# EAGLE board protoflo (EAGLE 6.1)
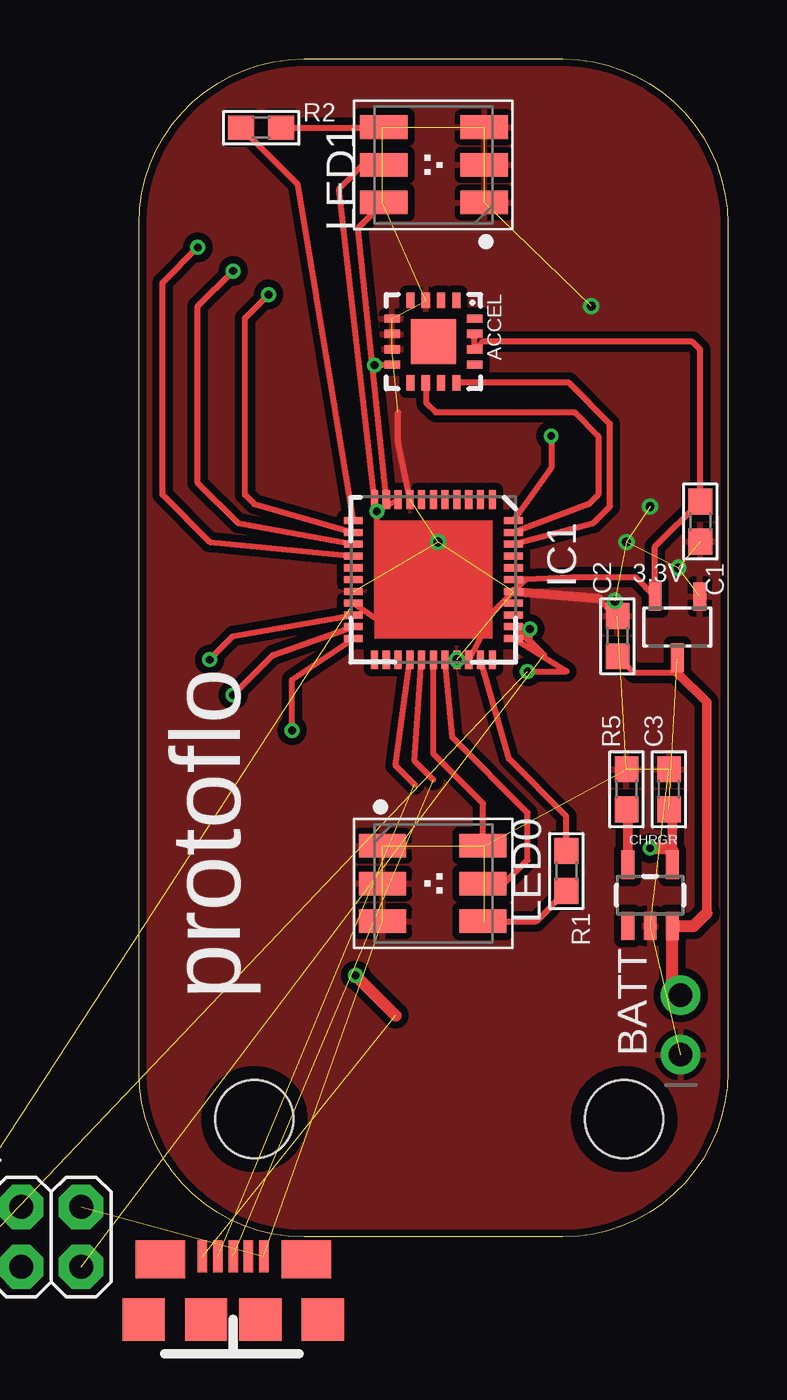
[diagram p0: board, top side]
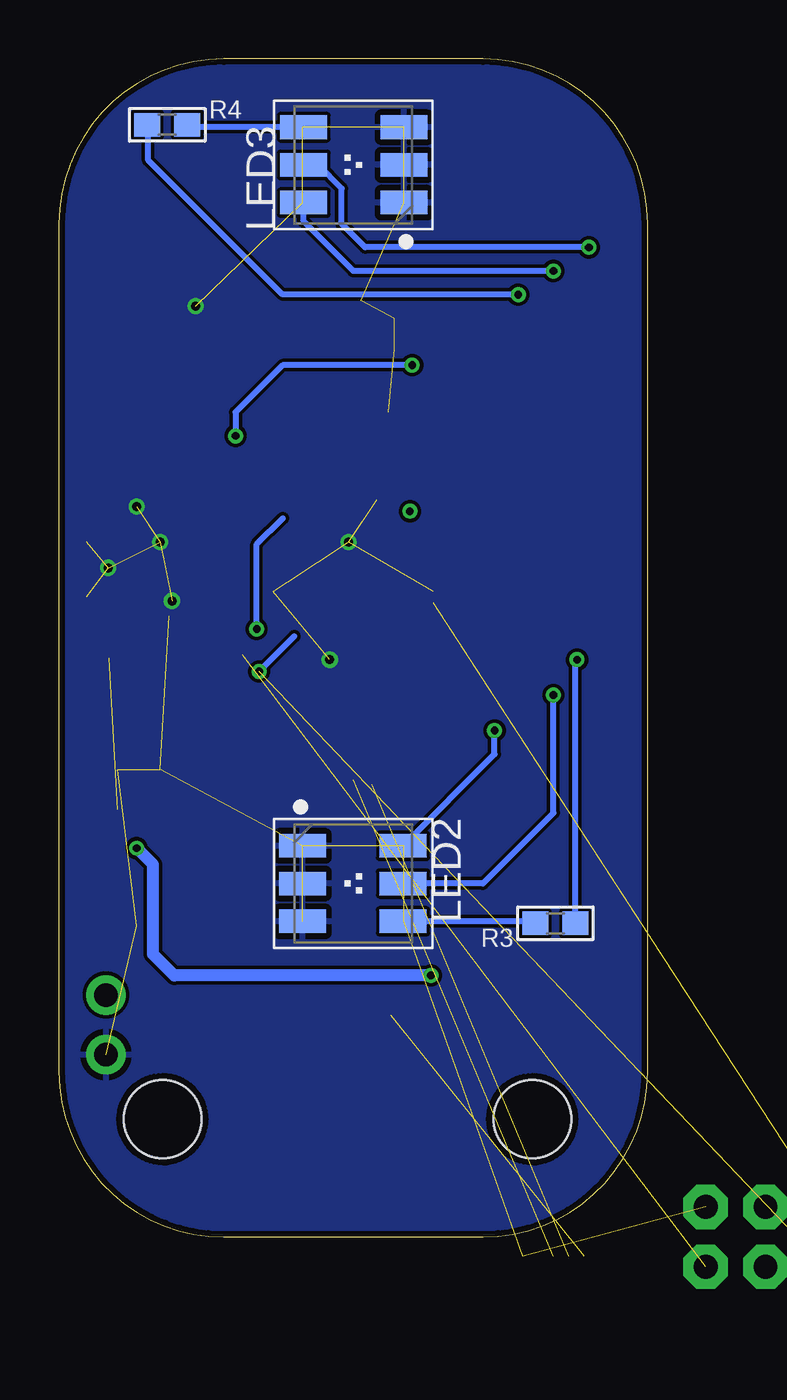
[diagram p1: board, bottom side, seen from below]

Size 25 x 50 mm. Coordinates in mm from the lower left corner, seen from the top.
Outline: 0,43 arc-90 7,50 18,50 arc-90 25,43 25,7 arc-90 18,0 7,0 arc-90 0,7 0,43
Copper layers (1*16): Top 0.035mm / dielectric 1.5mm / Bottom 0.035mm
Design rules: minimum track width 6mil, minimum drill 12mil, track to track 6mil, track to pad 6mil, pad to pad 6mil, via to via 6mil, smd to smd 0mil, copper to edge 10mil, drill to drill 10mil, minimum pad ring 10mil, minimum via ring 6mil, stop-mask expansion 2mil, vias tented up to drill 0mil, thermal gap 10mil
Net classes: 0 default: width 0.254 mm, clearance 0.127 mm

## Footprints (pad centres in the part's own frame; a part is rotated, then mirrored left to right if it is on the bottom)
SOT23-3 = smd 0.55 x 1.2: 1 0.95,1.3; 2 -0.95,1.3; 3 0,-1.3
LFCSP-16 = smd 1.9 x 1.9: 0 0,0 | smd 0.65 x 0.35: 1 -1.75,0.975; 2 -1.75,0.325; 3 -1.75,-0.325; 4 -1.75,-0.975; 9 1.75,-0.975; 10 1.75,-0.325; 11 1.75,0.325; 12 1.75,0.975 | smd 0.35 x 0.65: 5 -0.975,-1.75; 6 -0.325,-1.75; 7 0.325,-1.75; 8 0.975,-1.75; 13 0.975,1.75; 14 0.325,1.75; 15 -0.325,1.75; 16 -0.975,1.75
1X02_ROUND = drill 1 pad 1.676: 1 -1.27,0; 2 1.27,0
0603 = smd 1.1 x 1: 1 -0.85,0; 2 0.85,0
SOT23-5 = smd 0.55 x 1.2: 1 -0.95,-1.3; 2 0,-1.3; 3 0.95,-1.3; 4 0.95,1.3; 5 -0.95,1.3
USB-MICROB = smd 0.4 x 1.35: P1 -1.3,2.675; P2 -0.65,2.675; P3 0,2.675; P4 0.65,2.675; P5 1.3,2.675 | smd 1.8 x 1.8: PAD-LB -1.15,0; PAD-LLB -3.8,0; PAD-RB 1.15,0; PAD-RRB 3.8,0 | smd 2.1 x 1.6: PAD-LT -3.1,2.55; PAD-RT 3.1,2.55
QFN-44 = smd 0.8 x 0.3: 1 -3.4,2.5; 2 -3.4,2; 3 -3.4,1.5; 4 -3.4,1; 5 -3.4,0.5; 6 -3.4,0; 7 -3.4,-0.5; 8 -3.4,-1; 9 -3.4,-1.5; 10 -3.4,-2; 11 -3.4,-2.5; 23 3.4,-2.5; 24 3.4,-2; 25 3.4,-1.5; 26 3.4,-1; 27 3.4,-0.5; 28 3.4,0; 29 3.4,0.5; 30 3.4,1; 31 3.4,1.5; 32 3.4,2; 33 3.4,2.5 | smd 0.3 x 0.8: 12 -2.5,-3.4; 13 -2,-3.4; 14 -1.5,-3.4; 15 -1,-3.4; 16 -0.5,-3.4; 17 0,-3.4; 18 0.5,-3.4; 19 1,-3.4; 20 1.5,-3.4; 21 2,-3.4; 22 2.5,-3.4; 34 2.5,3.4; 35 2,3.4; 36 1.5,3.4; 37 1,3.4; 38 0.5,3.4; 39 0,3.4; 40 -0.5,3.4; 41 -1,3.4; 42 -1.5,3.4; 43 -2,3.4; 44 -2.5,3.4
2X03 = drill 1.016 pad 1.88 octagon: 1 -2.54,-1.27; 2 -2.54,1.27; 3 0,-1.27; 4 0,1.27; 5 2.54,-1.27; 6 2.54,1.27
RGBLED_PLCC6 = smd 1 x 2: 1 -1.6,-2.158; 2 0,-2.158; 3 1.6,-2.158; 4 1.6,2.108; 5 0,2.108; 6 -1.6,2.108
STAND-OFF = hole 3.302: 0,0

## Placement (x,y rotation side)
3.3V  VREG  [SOT23-3]  22.86,25.88 0 top
ACCEL  [LFCSP-16]  12.5,38 270 top
BATT  [1X02_ROUND]  23,9 90 top
C1  .1uF  [0603]  23.83,30.36 270 top
C2  1uF  [0603]  20.32,25.49 90 top
C3  4.7uF  [0603]  22.5,19 90 top
CHRGR  MCP73831  [SOT23-5]  21.7,14.5 0 top
CN1  [USB-MICROB]  4,-3.5 0 top
IC1  [QFN-44]  12.5,27.9 270 top
JP1  [2X03]  -5,0 0 top
LED0  [RGBLED_PLCC6]  12.5,15 270 top
LED1  [RGBLED_PLCC6]  12.5,45.5 90 top
LED2  [RGBLED_PLCC6]  12.5,15 270 bottom
LED3  [RGBLED_PLCC6]  12.5,45.5 90 bottom
R1  [0603]  18.15,15.53 270 top
R2  [0603]  5.18,47.08 0 top
R3  [0603]  3.92,13.31 180 bottom
R4  [0603]  20.4,47.2 0 bottom
R5  [0603]  20.7,19 90 top
U$1  [STAND-OFF]  4.9,5 0 top
U$2  [STAND-OFF]  20.6,5 0 top

## Library data of the parts
3.3V ACCEL BATT C1-C3 CN1 IC1 JP1 R1-R5 = nonolith
CHRGR U$1 U$2 = SparkFun
LED0 LED1-LED3 = microbuilder

## Nets
3.3V: 3.3V.2 ACCEL.14 ACCEL.15 C1.1 IC1.9 IC1.19 IC1.31 IC1.39 JP1.2
5V: 3.3V.3 C3.1 CHRGR.4 CN1.P1
ACCEL-X: ACCEL.12 IC1.42
ACCEL-Y: ACCEL.10 IC1.43
ACCEL-Z: ACCEL.8 IC1.44
BATT: BATT.2 C2.1 CHRGR.3
D+: CN1.P3 IC1.27
D-: CN1.P2 IC1.26
GND: 3.3V.1 ACCEL.3 ACCEL.5 ACCEL.6 ACCEL.7 BATT.1 C1.2 C2.2 C3.2 CHRGR.2 CN1.P5 IC1.8 IC1.18 IC1.30 IC1.38 JP1.6 LED0.1 LED0.2 LED0.3 LED1.1 LED1.2 LED1.3 LED2.1 LED2.2 LED2.3 LED3.1 LED3.2 LED3.3 R5.2
LED0B: IC1.28 LED0.6
LED0G: IC1.29 LED0.5
LED0R: LED0.4 R1.2
LED0RR: IC1.32 R1.1
LED1B: IC1.10 LED1.6
LED1G: IC1.11 LED1.5
LED1R: LED1.4 R2.2
LED1RR: IC1.12 R2.1
LED2B: IC1.22 LED2.6
LED2G: IC1.21 LED2.5
LED2R: LED2.4 R3.2
LED2RR: IC1.20 R3.1
LED3B: IC1.14 LED3.6
LED3G: IC1.15 LED3.5
LED3R: LED3.4 R4.2
LED3RR: IC1.13 R4.1
N$2: CHRGR.5 R5.1
PDI-CLK: IC1.35 JP1.5
PDI-DATA: IC1.34 JP1.1
STAT: CHRGR.1

## Tracks (layer width: path | path; a pad name or v marks a point on that pad's centre or on a via)
3.3V  (via drill 0.33)  (1 unrouted)
  Top 0.254: 14.8,26.3 16.4,27.9 IC1.39 18.35,28 21.09,28 3.3V.2 21.91,29.3 C1.1 23.83,37.67 23.5,38 14.57,38 | 14.8,26.3 14.9,26.2 IC1.31 | IC1.19 10,26.3 | 10,26.3 14.8,26.3 | IC1.9 v10.1,30.8 10.1,26.4 10,26.3 | ACCEL.14 ACCEL.15 | 14.57,38 ACCEL.14 | 14.57,38 ACCEL.14
  Bottom 0.254: v10.1,30.8 10.2,30.7
5V  (via drill 0.33)  (2 unrouted)
  Top 0.406: CHRGR.4 22.65,16.4 22.65,17.92 C3.1
  Top 0.508: 10.9,9.4 v9.2,11.1 | v21.7,16.5 22.55,16.5 22.65,16.4
  Bottom 0.508: v9.2,11.1 20.1,11.1 21,12 21,15.8 v21.7,16.5
ACCEL-X
  Top 0.254: ACCEL.12 18.25,36.25 20,34.5 20,31 19.3,30.3 IC1.42
ACCEL-Y
  Top 0.254: ACCEL.10 12.2,36.23 12.2,35.4 12.6,35 18.5,35 19.5,34 19.5,31.5 19.1,31.1 IC1.43
ACCEL-Z  (via drill 0.33)
  Top 0.254: ACCEL.8 10.03,37.02 v10,37 | v17.5,34 17.5,32.65 IC1.44
  Bottom 0.254: v10,37 15.5,37 17.5,35 v17.5,34
BATT
  Top 0.254: 20.38,24.58 21.03,23.94 22.86,23.94
  Top 0.406: 22.86,23.94 24.1,22.7 24.1,13.75
  Top 0.508: 20.38,24.58 C2.1 | 24.1,13.75 23.55,13.2 CHRGR.3 22.65,10.62 BATT.2
D+  (1 unrouted)
  Top 0.254: 12.5,19.4 11.7,20.2 IC1.27
D-  (1 unrouted)
  Top 0.254: 11.7,19.2 10.9,20 IC1.26
GND  (via drill 0.38)  (32 unrouted)
  Top 0.254: 19.5,27.1 20.25,26.34 C2.2 20.2,26.46 v20.2,27 | IC1.8 11,33.75 11,35
  Top 0.406: 19.5,27.1 IC1.38
  other vias: 21.7,31 13.5,24.5 22.9,28.4 20.7,29.5 19.2,39.5 12.7,29.5
  pour Top (isolate 0.305): -1,0 -1,50 25,50 25,0
  pour Bottom: -0.5,0 25,0 25,50 -0.5,50
LED0B
  Top 0.254: IC1.28 12.5,20.5 14.61,18.39 LED0.6
LED0G
  Top 0.254: LED0.5 15.5,15 16.5,16 16.5,18 13.3,21.2 IC1.29
LED0R
  Top 0.254: LED0.4 16.87,13.4 R1.2
LED0RR
  Top 0.254: IC1.32 15.7,20.3 18.15,17.85 R1.1
LED1B
  Top 0.254: IC1.10 9.3,42.81 LED1.6
LED1G
  Top 0.254: IC1.11 8.5,44.5 9.5,45.5 LED1.5
LED1R
  Top 0.254: R2.2 10.39,47.08 LED1.4
LED1RR
  Top 0.254: IC1.12 6.75,44.66 R2.1
LED2B  (via drill 0.33)
  Top 0.254: v6.5,21.5 6.5,23.65 IC1.22
  Bottom 0.254: LED2.6 6.5,20.49 v6.5,21.5
LED2G  (via drill 0.33)
  Top 0.254: v4,23 5.7,24.7 IC1.21
  Bottom 0.254: LED2.5 7,15 4,18 v4,23
LED2R
  Bottom 0.254: LED2.4 4.86,13.4 R3.2
LED2RR  (via drill 0.33)
  Top 0.254: v3,24.5 4,25.5 IC1.20
  Bottom 0.254: R3.1 3.07,24.43 v3,24.5
LED3B  (via drill 0.33)
  Top 0.254: IC1.14 4.2,30.3 2.5,32 2.5,39.5 v4,41
  Bottom 0.254: LED3.6 14.61,43.11 12.5,41 v4,41
LED3G  (via drill 0.33)
  Top 0.254: IC1.15 3,29.5 1,31.5 1,40.5 v2.5,42
  Bottom 0.254: LED3.5 14,45.5 13,44.5 13,43 12,42 v2.5,42
LED3R
  Bottom 0.254: LED3.4 19.45,47.1 R4.2
LED3RR  (via drill 0.33)
  Top 0.254: v5.5,40 4.5,39 4.5,31.5 4.9,31.1 IC1.13
  Bottom 0.254: R4.1 21.2,47.2 21.2,45.7 15.5,40 v5.5,40
N$2
  Top 0.406: CHRGR.5 20.75,18.1 R5.1
PDI-CLK  (via drill 0.33)  (1 unrouted)
  Top 0.254: IC1.35 17.2,24.7 16.6,25.3 v16.6,25.8
  Bottom 0.254: v16.6,25.8 16.6,29.4 15.5,30.5
PDI-DATA  (via drill 0.33)  (1 unrouted)
  Top 0.254: IC1.34 18.15,24 v16.5,24
  Bottom 0.254: 15,25.5 v16.5,24

## Text on the board
tNames: protoflo